# EAGLE board GPS_radiologger_v2_energy_harvesting (EAGLE 9.5.1)

Size 11.37 x 20.66 mm. Coordinates in mm from the lower left corner, seen from the top.
Outline: 0,0 11.37,0 11.37,20.66 0,20.66 0,0
Copper layers (1*16): Top 0.035mm / dielectric 1.5mm / Bottom 0.035mm
Design rules "default": minimum track width 6mil, minimum drill 0.35mm, track to track 6mil, track to pad 6mil, pad to pad 6mil, via to via 6mil, smd to smd 6mil, copper to edge 40mil, drill to drill 6mil, minimum pad ring 10mil, minimum via ring 8mil, stop-mask expansion 4mil, vias tented up to drill 0mil, thermal gap 10mil

## Footprints (pad centres in the part's own frame; a part is rotated, then mirrored left to right if it is on the bottom)
SOT23-3 = smd 0.8 x 0.9: 1 -0.95,-1; 2 0.95,-1; 3 0,1.1
SOT23-6 = smd 0.55 x 1.35: 1 -0.95,-1.375; 2 0,-1.375; 3 0.95,-1.375; 4 0.95,1.375; 5 0,1.375; 6 -0.95,1.375

## Placement (x,y rotation side)
Q1  1.1A/60V/600mΩ  [SOT23-3]  -4.5,-13.5 0 top  (outside the outline)
U3  TPL5110  [SOT23-6]  8.5,13 270 top

## Library data of the parts
Q1 = SparkFun-DiscreteSemi; PROD_ID: TRANS-08285
U3 = SparkFun-IC-Power; PROD_ID: IC-14387

## Nets
DELAY/M_DRIVE: U3.3
DONE: U3.4
DRIVE: Q1.1 U3.5
GND: U3.2
N$6: U3.1 U3.6
VDD: Q1.2
VDD_OUT: Q1.3

## Tracks (layer width: path | path; a pad name or v marks a point on that pad's centre or on a via)
DRIVE  (1 unrouted)
N$6  (1 unrouted)